# Altium PCB PCB.PcbDoc
Units mm, origin at the board's own origin, x right, y up, seen from the top; angles counter-clockwise.
Board outline 24 x 24 mm, 2 copper layers (Top Layer, Bottom Layer), stack 1.67 mm thick; 34 components, 24 nets, 107 pads, 115 vias.
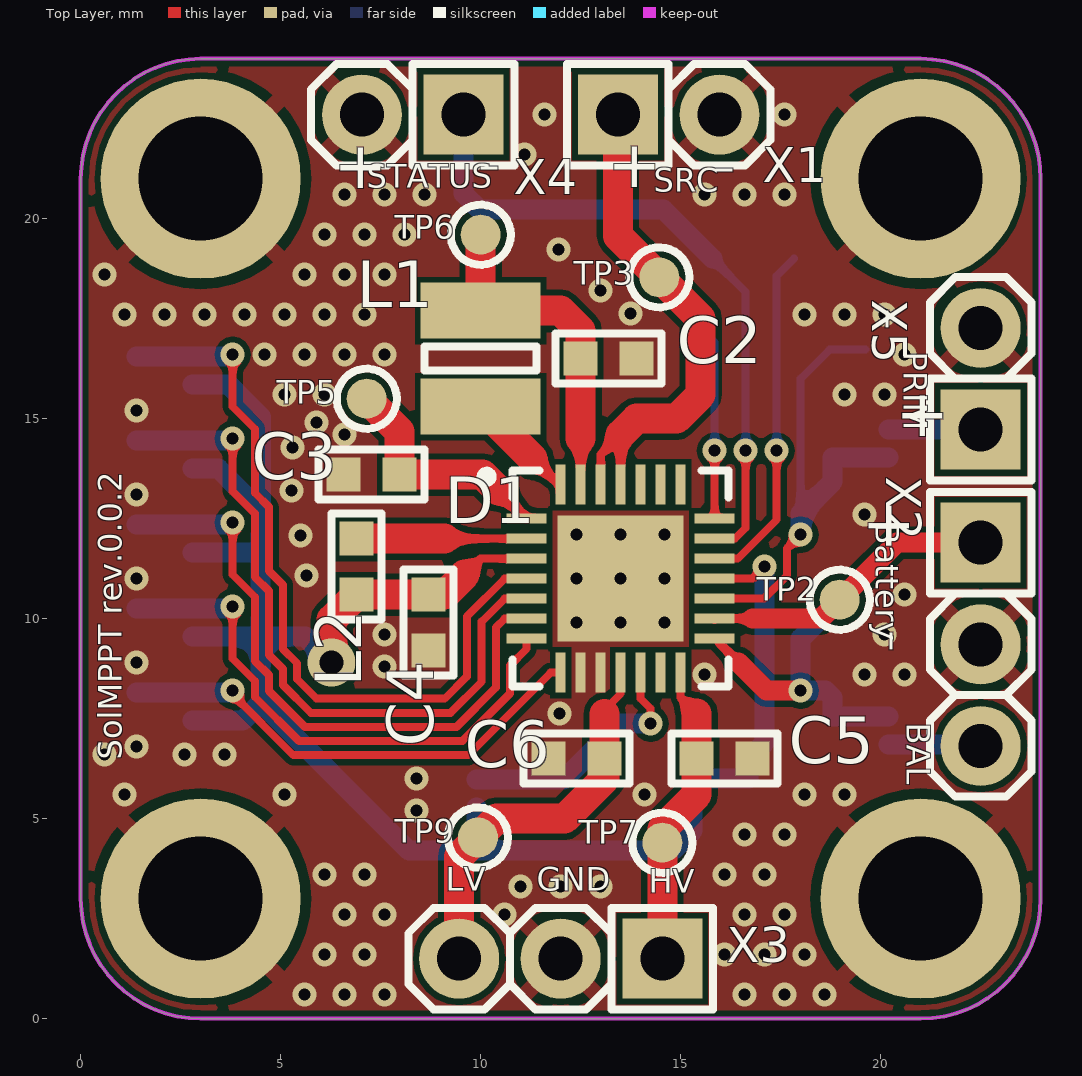
[diagram p0: Top Layer view]
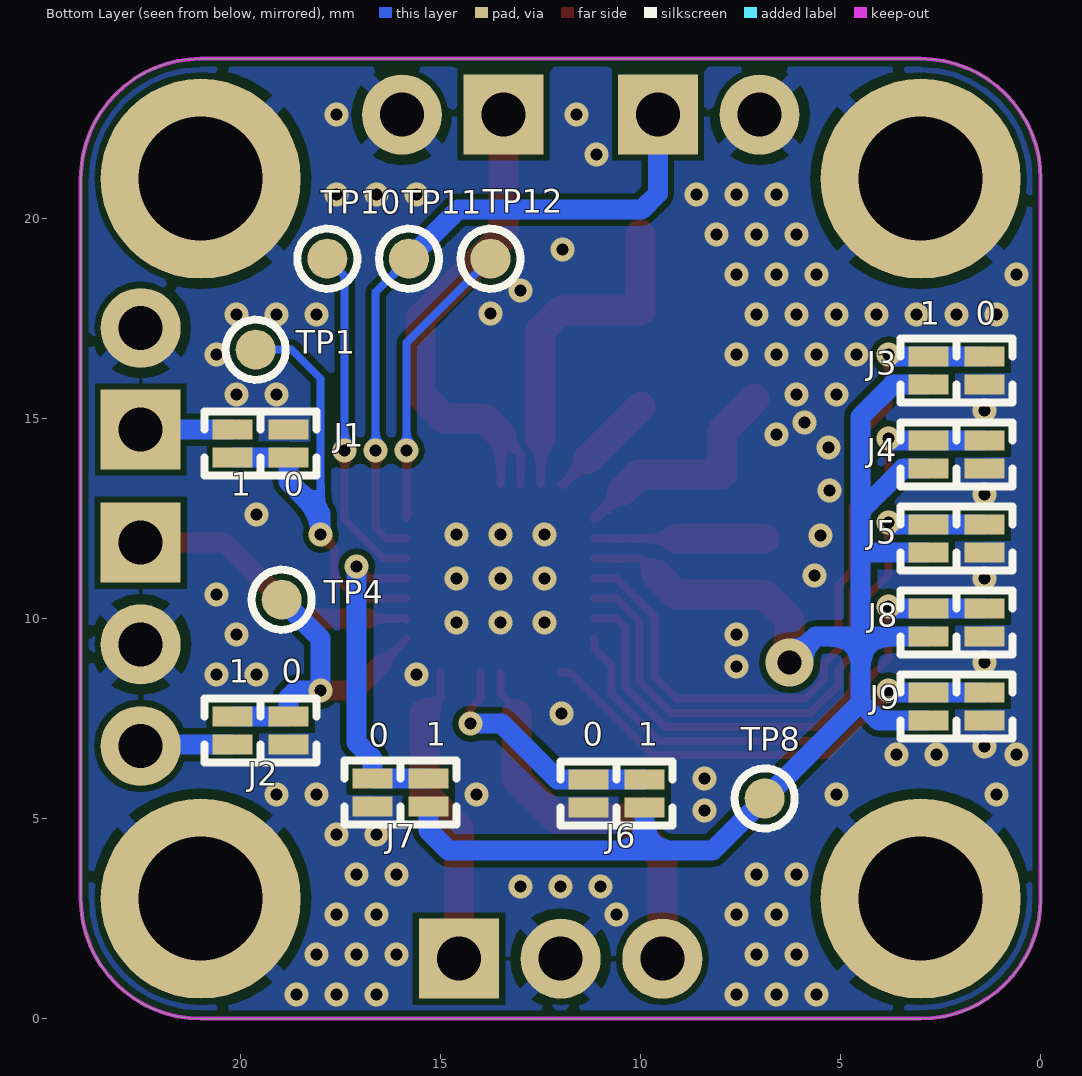
[diagram p1: Bottom Layer view, seen from below]
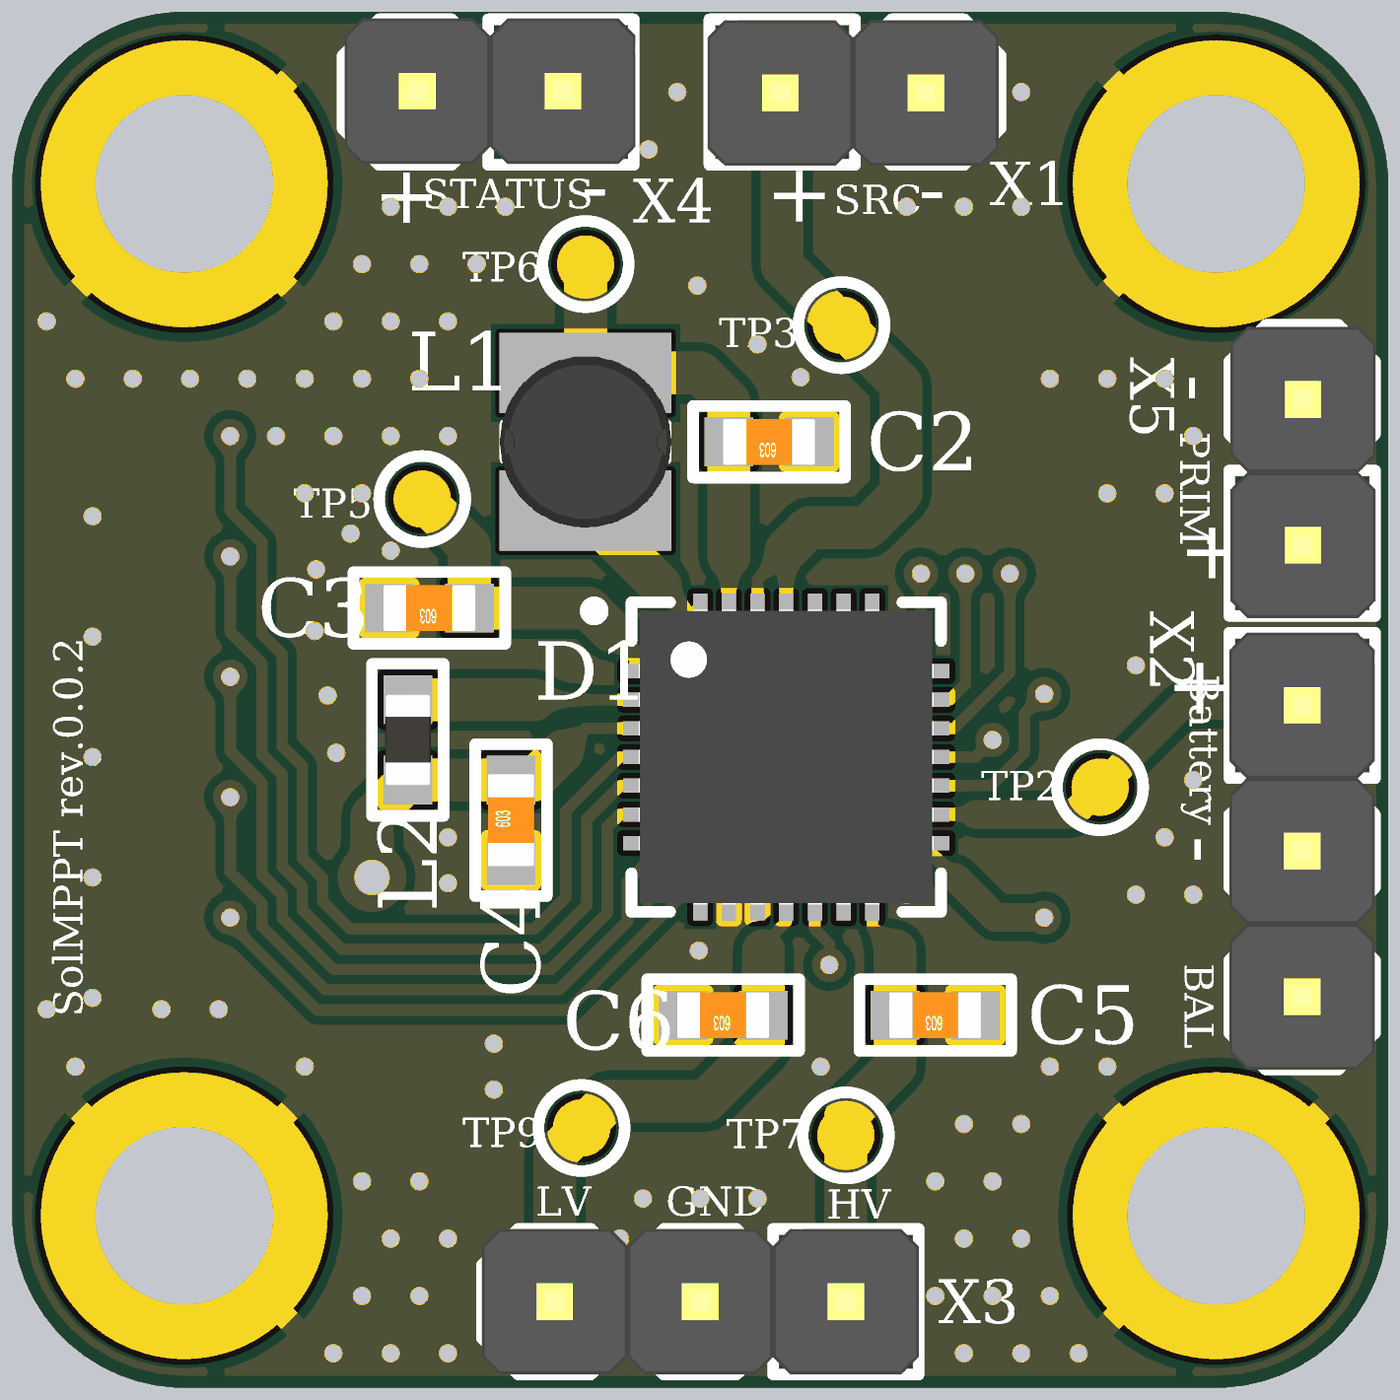
[diagram p2: 3D render of the assembled board from above, using the file's embedded part models]

## Layer stack, top to bottom
Top Solder: solder mask 0.0102, Solder Resist, Dk 3.5
Top Layer: signal copper 0.053
Dielectric 1: dielectric 1.564, FR-4, Dk 4.8
Bottom Layer: signal copper 0.053
Bottom Solder: solder mask 0.0102, Solder Resist, Dk 3.5

## Board outline
0,3 0,21 cw(c3,21) 3,24 21,24 cw(c21,21) 24,21 24,3 cw(c21,3) 21,0 3,0 cw(c3,3)

## Design rules (kind name [scope] priority, off if disabled: settings)
Clearance [All] p1: gap=0.153 ignorepadtopadclearanceinfootprint=FALSE except(0: Arc-Hole Track-Hole SMDPad-Hole THPad-Hole Via-Hole Fill-Hole Poly-Hole Region-Hole Text-Hole)
HoleSize [All] p1: absolutevalues=TRUE maxlimit=6.2 minlimit=0.2 maxpercent=80.000 minpercent=20.000
MinimumSolderMaskSliver [All] p1: minsoldermaskwidth=0
PlaneConnect [All] p1: pad.planeconnectstyle=Relief pad.reliefexpansion=0.508 pad.reliefentries=4 pad.reliefconductorwidth=0.254 pad.reliefairgap=0.254 via.planeconnectstyle=Direct via.reliefexpansion=0.508 via.reliefentries=4 via.reliefconductorwidth=0.254 via.reliefairgap=0.254
PolygonConnect [All] p1: thpad.connectstyle=Relief thpad.reliefconductorwidth=0.4 thpad.reliefentries=4 thpad.polygonreliefangle="45 Angle" thpad.airgapwidth=0.254 smdpad.connectstyle=Direct smdpad.reliefconductorwidth=0.254 smdpad.reliefentries=4 smdpad.polygonreliefangle="90 Angle" smdpad.airgapwidth=0.254 via.connectstyle=Direct via.reliefconductorwidth=0.254 via.reliefentries=4 via.polygonreliefangle="90 Angle" via.airgapwidth=0.254
RoutingVias [All] p1: holewidth=0.3 width=0.6 viastyle="Through Hole" minholewidth=0.3 minwidth=0.6 maxholewidth=6.3 maxwidth=6.3
SilkToSilkClearance [All] p1: silktosilkclearance=0.05
SilkToSolderMaskClearance [IsPad] p1: minsilkscreentomaskgap=0.05 clearancetoexposedcopper=TRUE
SolderMaskExpansion [All] p1: expansion=0.102
Width [All] p1: maxlimit=10 minlimit=0.153 preferedwidth=0.2
25 further rules are at their usual default settings.

## Components (designator, comment, footprint, x,y, rotation, side; value= is the part's Value field where it differs from the comment)
C2 "Ceramic capacitor, 10μF, X5R, ±20%, 10V, 0603, -55...+85°C" "CAP: 0603" 13.2,16.5 r180 top value=10?F
C3 "Ceramic capacitor, 22μF, X5R, ±20%, 10V, 0603, -55...+85°C" "CAP: 0603" 7.275,13.6 r180 top value=22?F
C4 "Ceramic capacitor, 10μF, X5R, ±20%, 10V, 0603, -55...+85°C" "CAP: 0603" 8.7,9.9 r90 top value=10?F
C5 "Ceramic capacitor, 10μF, X5R, ±20%, 10V, 0603, -55...+85°C" "CAP: 0603" 16.1,6.5 r180 top value=10?F
C6 "Ceramic capacitor, 10μF, X5R, ±20%, 10V, 0603, -55...+85°C" "CAP: 0603" 12.4,6.5 r180 top value=10?F
D1 "AEM10941-QFN" QFN50P500X500X85_HS-29N 13.5,11 r0 top
J1 "ValueManufacturerPartNumber" "CON: JUMPER x2" 20.2,14.375 r270 bottom
J2 "ValueManufacturerPartNumber" "CON: JUMPER x2" 18.8,7.2 r90 bottom
J3 "ValueManufacturerPartNumber" "CON: JUMPER x2" 1.4,16.2 r90 bottom
J4 "ValueManufacturerPartNumber" "CON: JUMPER x2" 1.4,14.1 r90 bottom
J5 "ValueManufacturerPartNumber" "CON: JUMPER x2" 1.4,12 r90 bottom
J6 "ValueManufacturerPartNumber" "CON: JUMPER x2" 11.3,5.625 r270 bottom
J7 "ValueManufacturerPartNumber" "CON: JUMPER x2" 16.7,5.65 r270 bottom
J8 "ValueManufacturerPartNumber" "CON: JUMPER x2" 1.4,9.9 r90 bottom
J9 "ValueManufacturerPartNumber" "CON: JUMPER x2" 1.4,7.8 r90 bottom
L1 "Fixed inductor, 10μH, ±20%, SDR0302, 900mA, -40...+125°C" "IND: SDR0302" 10,16.5 r90 top value=10?H
L2 "Fixed inductor, 10μH, ±20%, 0603, 250mA, -55...+125°C" "IND: 0603" 6.9,11.3 r270 top value=10?H
TP1 "TestPoint" TestPad 19.625,16.725 r90 bottom
TP2 "TestPoint" TestPad 18.975,10.475 r90 top
TP3 "TestPoint" TestPad 14.465,18.535 r90 top
TP4 "TestPoint" TestPad 18.975,10.475 r90 bottom
TP5 "TestPoint" TestPad 7.15,15.5 r90 top
TP6 "TestPoint" TestPad 10,19.6 r90 top
TP7 "TestPoint" TestPad 14.54,4.4 r90 top
TP8 "TestPoint" TestPad 6.9,5.506 r90 bottom
TP9 "TestPoint" TestPad 9.93,4.53 r90 top
TP10 "TestPoint" TestPad 17.835,19 r90 bottom
TP11 "TestPoint" TestPad 15.795,19 r90 bottom
TP12 "TestPoint" TestPad 13.755,19 r90 bottom
X1 "Connector, 2pin, 2.54mm, 500VAC, 3A" "CON: PLS-2" 14.7,22.6 r0 top
X2 "Connector, 3pin, 2.54mm, 500VAC, 3A" "CON: PLS-3" 22.5,9.36 r270 top
X3 "Connector, 3pin, 2.54mm, 500VAC, 3A" "CON: PLS-3" 12,1.5 r180 top
X4 "Connector, 2pin, 2.54mm, 500VAC, 3A" "CON: PLS-2" 8.3,22.6 r180 top
X5 "Connector, 2pin, 2.54mm, 500VAC, 3A" "CON: PLS-2" 22.5,16 r90 top

## Footprints (in the part's own frame and the unit in brackets; to place one, negate y for a bottom-side part, rotate by r counter-clockwise, add the part's x,y. Pads: shape width x height; smd on the part's side, far side on the other; paste and mask are expansions set on the pad)
"CAP: 0603" [mm]
  rect 0.85x0.85 smd: 1(-0.7,0) 2(0.7,0)
  silkscreen extent -1.33,-0.63 1.33,0.63, body extent -0.8,-0.4 0.8,0.4, height 0.3
"CON: JUMPER x2" [mm]
  rect 0.5x1 smd: 1(-0.35,1.4) 2(0.35,1.4) 3(-0.35,0) 4(0.35,0)
  silkscreen extent -0.8,-0.7 0.8,2.1
"CON: PLS-2" [mm]
  rect 2x2 hole 1.1: 1(-1.27,0)
  round 2 hole 1.1: 2(1.27,0)
  silkscreen extent -2.54,-1.27 2.54,1.27, body extent -2.57,-1.28 2.51,1.26, height 8.54
"CON: PLS-3" [mm]
  rect 2x2 hole 1.1: 1(-2.54,0)
  round 2 hole 1.1: 2(0,0) 3(2.54,0)
  silkscreen extent -3.81,-1.27 3.81,1.27, body extent -3.81,-1.27 3.81,1.27, height 8.54
"IND: 0603" [mm]
  rect 0.85x0.85 smd: 1(-0.7,0) 2(0.7,0)
  silkscreen extent -1.33,-0.63 1.33,0.63, body extent -0.8,-0.4 0.8,0.4, height 0.8
"IND: SDR0302" [mm]
  rect 1.4x3 smd mask+0.075: 1(-1.2,0) 2(1.2,0)
  silkscreen extent -0.3,-1.4 0.3,1.4, body extent -1.49,-1.5 1.49,1.5, height 3
QFN50P500X500X85_HS-29N [mm] "QFN, 28-Leads, Body 5,00x5,00mm, Pitch 0,50mm, Thermal Pad 3,15x3,15mm, IPC Medium Density"
  rect 1x0.25 smd: 1(-2.35,1.5) 2(-2.35,1) 3(-2.35,0.5) 4(-2.35,0) 5(-2.35,-0.5) 6(-2.35,-1) 7(-2.35,-1.5) 15(2.35,-1.5) 16(2.35,-1) 17(2.35,-0.5) 18(2.35,0) 19(2.35,0.5) 20(2.35,1) 21(2.35,1.5)
  rect 0.25x1 smd: 8(-1.5,-2.35) 9(-1,-2.35) 10(-0.5,-2.35) 11(0,-2.35) 12(0.5,-2.35) 13(1,-2.35) 14(1.5,-2.35) 22(1.5,2.35) 23(1,2.35) 24(0.5,2.35) 25(0,2.35) 26(-0.5,2.35) 27(-1,2.35) 28(-1.5,2.35)
  rect 3.15x3.15 smd: 29(0,0)
  silkscreen extent -3.47,-2.7 2.7,2.7, body extent -2.57,-2.57 2.57,2.57, height 0.85
TestPad [mm]
  round 1 smd paste-5: 1(0,0)
  silkscreen extent -0.75,-0.75 0.75,0.75

## Part data
C2 C4 C5 C6: library part Ceramic_0603, Manufacturer="Murata Electronics", Package=0603, PartNumber=GRM188R61A106ME69D, Temperature=-55...+85°C, Tolerance=±20%, TypeCapacitor="Ceramic capacitor", TypeDielectric=X5R, ValueManufacturerPartNumber="Ceramic capacitor, 10?F, X5R, ±20%, 10V, 0603, -55...+85°C", Voltage=10V, HelpURL=https://www.digikey.com/en/products/detail/murata-electronics/GRM188R61A106ME69D/5027560
C3: library part Ceramic_0603, Manufacturer="Murata Electronics", Package=0603, PartNumber=GRM188R61A226ME15D, Temperature=-55...+85°C, Tolerance=±20%, TypeCapacitor="Ceramic capacitor", TypeDielectric=X5R, ValueManufacturerPartNumber="Ceramic capacitor, 22?F, X5R, ±20%, 10V, 0603, -55...+85°C", Voltage=10V, HelpURL=https://www.digikey.com/en/products/detail/murata-electronics/GRM188R61A226ME15D/5027561
D1: library part AEM10941, "Power Management Specialised - PMIC AEM10941 IC - Photovoltaic Energy Harvesting Manager.", Case=QFN-28, Manufacture=e-peas, OperationTemperature=-40...+125°C, HelpURL=https://eu.mouser.com/ProductDetail/e-peas/AEM10941-QFN/?qs=W%2FMpXkg%252BdQ7CeqB2lBPbRQ%3D%3D, PartNumber=AEM10941-QFN, Type="Photovoltaic Energy Harvesting Manager"
J1 J2 J3 J4 J5 J6 J7 J8 J9: library part Jumper_double, CommentText="\"Перемычка\""
L1: library part Inductor_SDR0302, Manufacturer=Bourns, MaxCurrent=900mA, Package=SDR0302, PartNumber=SDR0302-100ML, Temperature=-40...+125°C, Tolerance=±20%, TypeInductor="Fixed inductor", ValueManufacturerPartNumber="Fixed inductor, 10?H, ±20%, SDR0302, 900mA, -40...+125°C", HelpURL=https://www.digikey.com/product-detail/en/bourns-inc/SDR0302-100ML/SDR0302-100MLCT-ND/2127048
L2: library part Inductor_0603, Manufacturer="TDK Corporation", MaxCurrent=250mA, Package=0603, PartNumber=MLZ1608M100WT000, Temperature=-55...+125°C, Tolerance=±20%, TypeInductor="Fixed inductor", ValueManufacturerPartNumber="Fixed inductor, 10?H, ±20%, 0603, 250mA, -55...+125°C", HelpURL=https://www.digikey.com/en/products/detail/tdk-corporation/MLZ1608M100WT000/2465148
TP1 TP2 TP3 TP4 TP5 TP6 TP7 TP8 TP9 TP10 TP11 TP12: "SMT test point"
X1 X4 X5: library part PLS-2, CurrentMax=3A, Manufacturer=Connfly, VoltageMax=500VAC, CommentText="\"Разъем\"", HelpURL=https://www.chipdip.ru/product/pls-2, Multichannel=2pin, PartNumber=PLS-2, Pitch=2.54mm, TypeConnector=Connector, ValueManufacturerPartNumber="Connector, 2pin, 2.54mm, 500VAC, 3A"
X2 X3: library part PLS-3, CurrentMax=3A, Manufacturer=Connfly, VoltageMax=500VAC, CommentText="\"Разъем\"", HelpURL=https://www.chipdip.ru/product/pls-3, Multichannel=3pin, PartNumber=PLS-3, Pitch=2.54mm, TypeConnector=Connector, ValueManufacturerPartNumber="Connector, 3pin, 2.54mm, 500VAC, 3A"

## Free pads (board coordinates)
  round 5 hole 3.1: ""(3,3) ""(3,21) ""(21,3) ""(21,21)

## Via types
v1: diameter 0.6, hole 0.3, Top Layer to Bottom Layer, tented both sides, 105 vias
v2: diameter 0.6, hole 0.3, Top Layer to Bottom Layer, tented bottom, 9 vias
v3: diameter 1.2, hole 0.6, Top Layer to Bottom Layer, tented both sides, 1 vias

## Nets (pads, with @x,y where several pads share a name; then routed paths per layer and width w, separated by ;. In a path a pad name is that pad's centre, name@x,y a point inside that pad or via, vN(x,y) a via of type N, cw(c..) or ccw(c..) an arc to the next point about the centre after c; other vN are vias at no path point)
BAL: D1.15 J2.2 J2.4 TP4.1 | length 8.1
  Top Layer w0.2: D1.15 16.45,8.9
  Top Layer w0.5: 16.45,8.9 17.15,8.2 v1(18,8.2)
  Bottom Layer w0.5: TP4.1 18,9.5 v1(18,8.2) 18.625,8.2 18.8,8.025 J2.4 J2.2
BALX: J2.1 X2.3 | length 2.3
  Bottom Layer w0.5: J2.1 22.47,6.85 X2.3
BATT: D1.16 TP2.1 X2.1 | length 7.5
  Top Layer w0.2: D1.16@15.85,9.973 D1.16 16.8,10
  Top Layer w0.5: 16.8,10 18.5,10 TP2.1 20.4,11.9 X2.1
BOOST: C3.1 D1.1 TP5.1 | length 5.9
  Top Layer w0.25: 10.45,13.2 D1.1
  Top Layer w0.75: TP5.1 7.972,14.678 7.972,13.6 C3.1 10.05,13.6 10.45,13.2
BUCK: C4.2 D1.3 J3.1 J4.1 J5.1 J6.2 J7.2 J8.1 J9.1 L2.2 TP8.1 | length 39.5
  Top Layer w0.2: 9.6,11.1 10,11.5 D1.3
  Top Layer w0.75: v3(6.275,8.9) 6.275,9.975 L2.2 8.2,10.6 9.1,10.6 9.6,11.1
  Bottom Layer w0.5: J9.1 4.05,7.45 4.503,7.903 ; J8.1 4.5,9.55 ; J5.1 4.45,11.65 4.5,11.6 ; J4.1 3.444,13.75 4.503,12.691 ; J3.1 3.7,15.85 4.503,15.047 4.503,12.691 ; v3(6.275,8.9) 5.626,9.55 4.5,9.55 ; J6.2 9.9,4.2 ; J7.2 15.3,4.7 14.8,4.2 9.9,4.2 ; 4.5,9.55 4.5,8.494 4.503,8.491 4.503,7.903 ; 4.5,9.55 4.5,10.006 4.503,10.009 4.503,10.591 4.5,10.594 4.5,11.6 ; 4.5,11.6 4.5,12.106 4.503,12.109 4.503,12.691 ; 4.503,7.903 TP8.1 8.206,4.2 9.9,4.2
BUFSRC: C2.2 D1.27 L1.2 TP6.1 | length 8.5
  Top Layer w0.2: D1.27 12.5,14.5
  Top Layer w0.75: TP6.1 L1.2 12,17.7 12.5,17.2 C2.2 12.5,14.5
CFG0: D1.6 J5.2 J5.4 | length 15.8
  Top Layer w0.2: v1(3.8,12.4) 3.8,11.1 4.353,10.547 4.353,8.946 4.706,8.593 4.706,8.195 5.607,7.294 9.392,7.294 10.378,8.28 10.378,9.778 10.6,10 D1.6
  Bottom Layer w0.5: J5.4 J5.2 3.75,12.35 v1(3.8,12.4)
CFG1: D1.5 J4.2 J4.4 | length 17.5
  Top Layer w0.2: v1(3.8,14.5) 3.8,13.182 4.353,12.629 4.353,11.046 4.706,10.693 4.706,9.092 5.059,8.739 5.059,8.341 5.753,7.647 9.246,7.647 10.025,8.426 10.025,9.925 10.6,10.5 D1.5
  Bottom Layer w0.5: J4.4 J4.2 3.75,14.45 v1(3.8,14.5)
CFG2: D1.4 J3.2 J3.4 | length 19.3
  Top Layer w0.2: v1(3.8,16.6) 3.8,15.3 4.353,14.747 4.353,13.147 4.706,12.794 4.706,11.192 5.059,10.839 5.059,9.239 5.412,8.886 5.412,8.488 5.9,8 9.1,8 9.653,8.553 9.653,10.053 10.6,11 D1.4
  Bottom Layer w0.5: J3.4 J3.2 3.75,16.55 v1(3.8,16.6)
ENHV: D1.12 J6.1 J6.3 | length 6.3
  Top Layer w0.2: D1.12 14,8 14.25,7.75 v1(14.25,7.375)
  Bottom Layer w0.5: J6.1 J6.3 12.075,5.975 13.475,7.375 v1(14.25,7.375)
ENLV: D1.18 J7.1 J7.3 | length 8.2
  Top Layer w0.2: D1.18 16.8,11 v1(17.1,11.3)
  Bottom Layer w0.5: J7.1 J7.3 16.7,6.5 17.1,6.9 v1(17.1,11.3)
GND: C2.1 C3.2 C4.1 C5.1 C6.2 D1.9 D1.10 D1.29 J1.1 J2.3 J3.3 J4.3 J5.3 J6.4 J7.4 J8.3 J9.3 pad. X1.2 X2.2 X3.2 X4.2 X5.2
  other v1: 5.6,0.6 6.6,0.6 7.6,0.6 16.6,0.6 17.6,0.6 18.6,0.6 6.1,1.6 7.1,1.6 16.1,1.6 17.1,1.6 18.1,1.6 6.6,2.6 7.6,2.6 10.6,2.6 16.6,2.6 17.6,2.6 11,3.3 12,3.3 13,3.3 6.1,3.6 7.1,3.6 16.1,3.6 17.1,3.6 16.6,4.6 17.6,4.6 8.4,5.2 1.1,5.6 5.1,5.6 14.1,5.6 18.1,5.6 19.1,5.6 8.4,6 0.6,6.6 2.6,6.6 3.6,6.6 1.4,6.8 11.975,7.625 15.6,8.6 19.6,8.6 20.6,8.6 7.6,8.8 1.4,8.9 7.6,9.6 20.1,9.6 20.6,10.6 1.4,11 5.65,11.075 5.5,12.075 19.6,12.6 1.4,13.1 5.275,13.2 5.3,14.275 6.6,14.6 5.9,14.9 1.4,15.2 5.1,15.6 6.1,15.6 19.1,15.6 20.1,15.6 4.6,16.6 5.6,16.6 6.6,16.6 7.6,16.6 20.6,16.6 1.1,17.6 2.1,17.6 3.1,17.6 4.1,17.6 5.1,17.6 6.1,17.6 7.1,17.6 18.1,17.6 19.1,17.6 20.1,17.6 13.75,17.625 13,18.2 0.6,18.6 5.6,18.6 6.6,18.6 7.6,18.6 11.95,19.225 6.1,19.6 7.1,19.6 8.1,19.6 6.6,20.6 7.6,20.6 8.6,20.6 15.6,20.6 16.6,20.6 17.6,20.6 11.1,21.6 11.6,22.6 17.6,22.6
  other v2: 12.4,9.9 13.5,9.9 14.6,9.9 12.4,11 13.5,11 14.6,11 12.4,12.1 13.5,12.1 14.6,12.1
HVOUT: C5.2 D1.14 TP7.1 X3.1 | length 7.7
  Top Layer w0.2: D1.14 15,8.025 15.4,7.625
  Top Layer w0.75: X3.1 TP7.1 14.54,4.74 15.4,5.6 15.4,7.625
LVOUT: C6.1 D1.11 TP9.1 X3.3 | length 9.8
  Top Layer w0.2: 13.1,7.622 13.1,7.725 13.5,8.125 D1.11
  Top Layer w0.75: X3.3 9.46,4.06 TP9.1 10.4,5 12.1,5 13.1,6 13.1,7.622
NetD1_2: D1.2 L2.1 | length 4.3
  Top Layer w0.2: 9.1,12 D1.2
  Top Layer w0.75: L2.1 9.1,12
NetD1_28: D1.28 L1.1 | length 2.8
  Top Layer w0.2: 11.3,14 11.95,13.35 D1.28
  Top Layer w0.75: L1.1 11.3,14
PRIM: D1.17 J1.2 J1.4 TP1.1 | length 12.2
  Top Layer w0.2: D1.17 16.589,10.5 16.592,10.503 17.085,10.503 17.653,11.071 17.653,11.753 v1(18,12.1)
  Bottom Layer w0.2: 18,12.625 18,16 18.725,16.725 TP1.1
  Bottom Layer w0.5: v1(18,12.1) 18,12.625 18.8,13.425 J1.2 J1.4
PRIM+: J1.3 X5.1 | length 2.3
  Bottom Layer w0.5: J1.3 22.495,14.725 X5.1
SELMPP0: D1.8 J9.2 J9.4 | length 12.2
  Top Layer w0.2: v1(3.8,8.2) 3.8,8.102 5.314,6.588 9.688,6.588 11.75,8.65 D1.8
  Bottom Layer w0.5: J9.4 J9.2 3.75,8.15 v1(3.8,8.2)
SELMPP1: D1.7 J8.2 J8.4 | length 13.8
  Top Layer w0.2: v1(3.8,10.3) 3.8,9 4.353,8.447 4.353,8.049 5.461,6.941 9.539,6.941 10.731,8.133 10.731,8.831 11.15,9.25 D1.7
  Bottom Layer w0.5: J8.4 J8.2 3.75,10.25 v1(3.8,10.3)
SRC: D1.25 D1.26 TP3.1 X1.1 | length 13
  Top Layer w0.2: D1.26 13,14.105 13.5,14.605 D1.25
  Top Layer w0.75: X1.1 13.43,19.57 15.5,17.5 15.5,15.6 14.9,15 13.895,15 13.5,14.605
STATUS0: D1.21 TP12.1 | length 7.4
  Top Layer w0.2: D1.21 v1(15.85,14.2)
  Bottom Layer w0.2: TP12.1 15.85,16.905 v1(15.85,14.2)
STATUS1: D1.20 TP11.1 X4.1 | length 16.8
  Top Layer w0.2: D1.20@15.856,12.006 D1.20 16.352,12 16.625,12.273 v1(16.625,14.2)
  Bottom Layer w0.2: TP11.1 16.625,18.17 v1(16.625,14.2)
  Bottom Layer w0.5: X4.1 9.57,20.63 9.975,20.225 14.57,20.225 TP11.1
STATUS2: D1.19 TP10.1 | length 8.7
  Top Layer w0.2: D1.19 16.424,11.5 17.4,12.476 v1(17.4,14.2)
  Bottom Layer w0.2: v1(17.4,14.2) 17.4,18.565 TP10.1
pads on no net: D1.13 D1.22 D1.23 D1.24

## Polygon pours and split planes (outlines as drawn)
no net on Top Layer "Top Layer-No Net" (solid, pour order 7): 0,3 0,21 cw(c3,21) 3,24 21,24 cw(c21,21) 24,21 24,3 cw(c21,3) 21,0 3,0 cw(c3,3)
GND on Top Layer "Top Layer- GND" (solid, pour order 4): 0,3 0,21 cw(c3,21) 3,24 21,24 cw(c21,21) 24,21 24,3 cw(c21,3) 21,0 3,0 cw(c3,3)
no net on Bottom Layer "Bottom Layer-No Net" (solid, pour order 8): 0,3 0,21 cw(c3,21) 3,24 21,24 cw(c21,21) 24,21 24,3 cw(c21,3) 21,0 3,0 cw(c3,3)
GND on Bottom Layer "Bottom Layer- GND" (solid, pour order 5): 0,3 0,21 cw(c3,21) 3,24 21,24 cw(c21,21) 24,21 24,3 cw(c21,3) 21,0 3,0 cw(c3,3)

## Keep-outs
Keep-Out Layer:
  the board outline again, w0.1

## Silkscreen, mask and mechanical layers (free items; w line width, h text height)
Top Overlay:
  text "STATUS" at 7.15,20.575 h1
  text "-" at 9.925,20.475 h2
  text "SRC" at 14.325,20.475 h1
  text "+" at 13.175,20.4 h2
  text "-" at 15.8,20.425 h2
  text "+" at 6.325,20.375 h2
  text "-" at 20.95,17.2 h2 r90
  text "PRIM" at 20.375,16.675 h1 r270
  text "+" at 20.375,14.175 h2
  text "Battery" at 19.675,12.4 h1 r270
  text "+" at 21.1,11.65 h2 r90
  text "-" at 21.05,9.15 h2 r90
  text "BAL" at 20.45,7.4 h1 r270
  text "SolMPPT rev.0.0.2" at 1.225,6.475 h1 r90
  text "LV" at 9.125,3 h1
  text "GND" at 11.4,3 h1
  text "HV" at 14.2,2.95 h1
Bottom Overlay:
  text "0" at 1.625,17.15 h1
  text "1" at 3.025,17.15 h1
  text "0" at 18.925,12.875 h1
  text "1" at 20.25,12.875 h1
  text "0" at 18.975,8.2 h1
  text "1" at 20.3,8.2 h1
  text "1" at 10.075,6.625 h1
  text "0" at 11.45,6.625 h1
  text "1" at 15.375,6.625 h1
  text "0" at 16.8,6.6 h1

## Dimensions
3,24 to 3,0 on Mechanical 5
0,21 to 24,21 on Mechanical 5